# Altium PCB MZCAT_motherboard.PcbDoc (part 3 of 4)
Units mm, origin at the board's own origin, x right, y up, seen from the top; angles counter-clockwise.
Board outline 99.01 x 133.6 mm, 6 copper layers (Top Layer, Ref Top, Layer 2, Layer 3, Ref Bot, Bottom Layer), stack 1.473 mm thick; 289 components, 231 nets, 1176 pads, 492 vias.
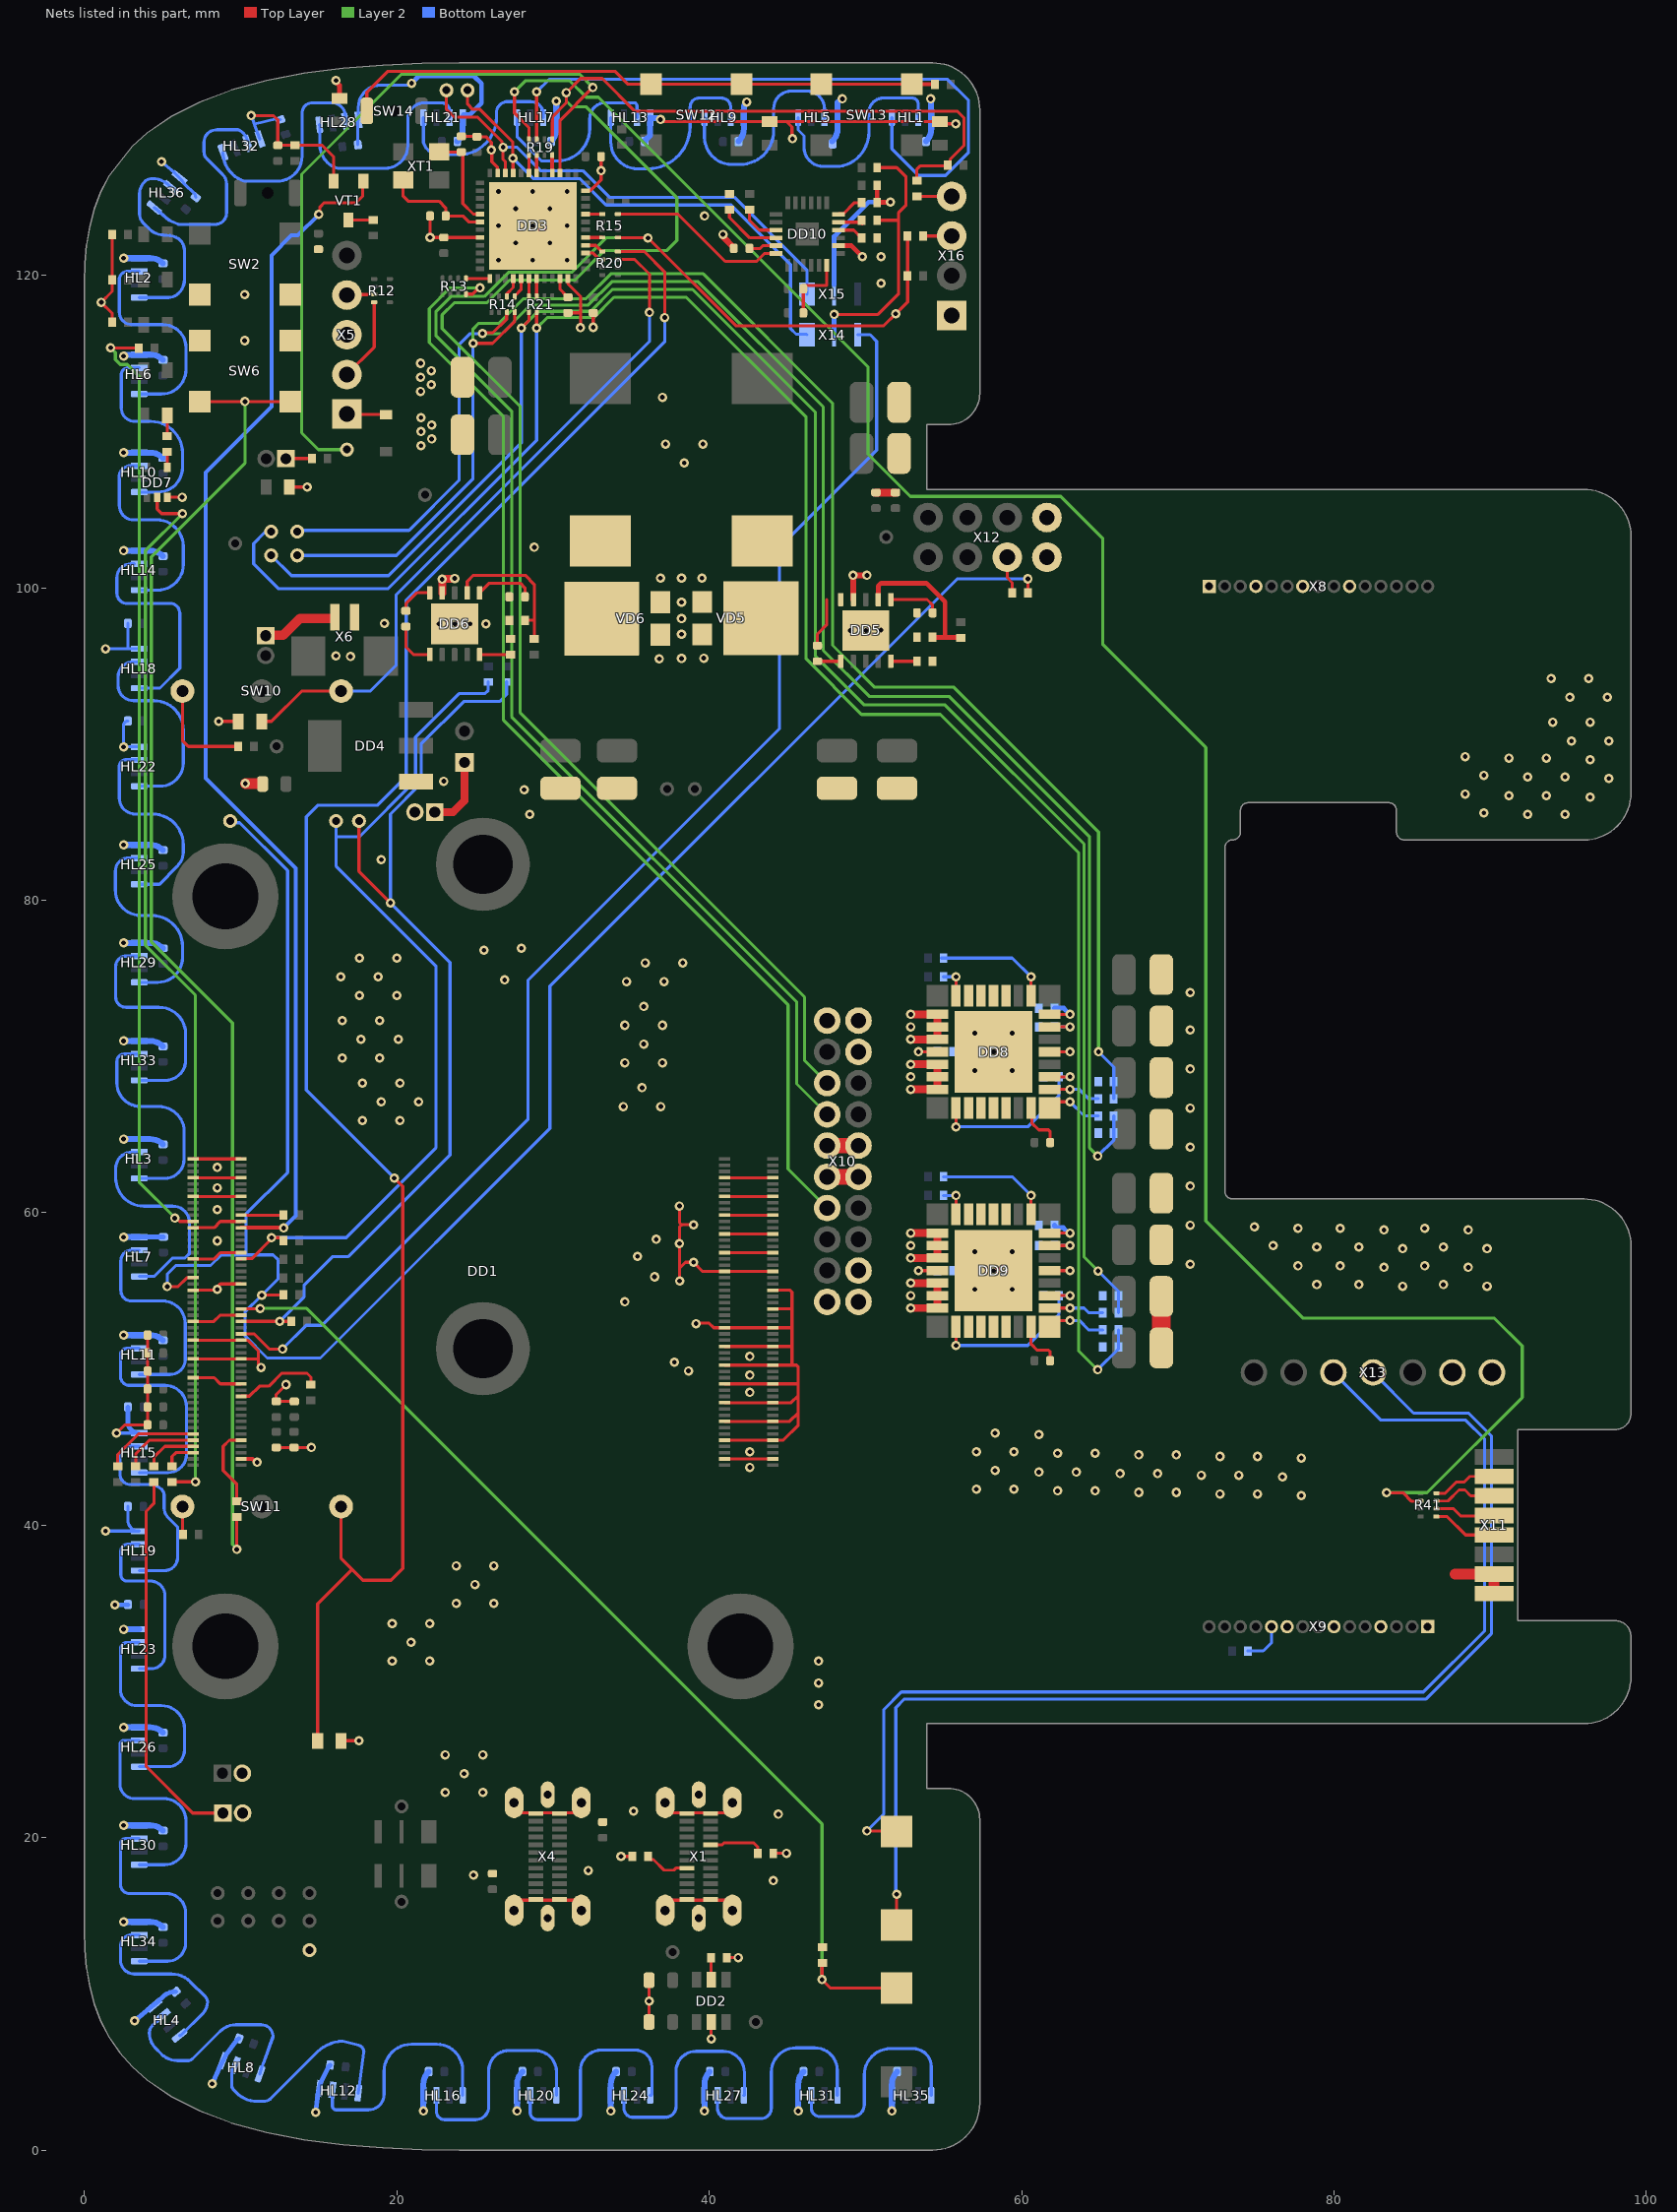
[diagram p7: the nets of this part, all layers, seen from the top]

## Via types
v1: diameter 0.6, hole 0.3, Top Layer to Bottom Layer, tented both sides, 477 vias
v2: diameter 0.6, hole 0.3, Top Layer to Bottom Layer, 15 vias

## Nets (pads, with @x,y where several pads share a name; then routed paths per layer and width w, separated by ;. In a path a pad name is that pad's centre, name@x,y a point inside that pad or via, vN(x,y) a via of type N, cw(c..) or ccw(c..) an arc to the next point about the centre after c; other vN are vias at no path point) (continued)
GND: DD1.1 DD1.2 DD1.7 DD1.8 DD1.13 DD1.14 DD1.22 DD1.23 DD1.32 DD1.33 DD1.42 DD1.43 DD1.52 DD1.53 DD1.59 DD1.60 DD1.65 DD1.66 DD1.71 DD1.74 DD1.98 DD1.107 DD1.108 DD1.113 DD1.114 DD1.119 DD1.120 DD1.125 DD1.126 DD1.131 DD1.132 DD1.137 DD1.138 DD1.144 DD1.150 DD1.155 DD1.156 DD1.161 DD1.162 DD1.167 DD1.168 DD1.173 DD1.174 DD1.179 DD1.180 DD1.185 DD1.186 DD1.191 DD1.192 DD1.197 DD1.198 DD2.2 DD3.8 DD3.23 DD3.35 DD3.47 DD3.49 DD4.1 DD5.0 DD5.9 DD6.0 DD6.9 DD7.3 DD8.5 DD8.18 DD8.19 DD8.20 DD8.22 DD8.23 DD8.24 DD8.33 DD9.5 DD9.18 DD9.19 DD9.20 DD9.22 DD9.23 DD9.24 DD9.33 DD10.18 DD10.20 HL1.4 HL2.4 HL3.4 HL4.4 HL5.4 HL6.4 HL7.4 HL8.4 HL9.4 HL10.4 HL11.4 HL12.4 HL13.4 HL14.4 HL15.4 HL16.4 HL17.4 HL18.4 HL19.4 HL20.4 HL21.4 HL22.4 HL23.4 HL24.4 HL25.4 HL26.4 HL27.4 HL28.4 HL29.4 HL30.4 HL31.4 HL32.4 HL33.4 HL34.4 HL35.4 HL36.4 R5.1 R9.1 R10.1 R11.1 R16.1 R22.2 R23.1 R24.1 R25.2 R26.2 R28.1 R30.1 R44.1 R45.1 R46.1 R47.1 R55.1 R57.1 R58.1 R59.1 R60.1 R61.1 R62.1 R63.1 R65.1 R66.1 SW2.1 SW5.2 SW6.2 SW7.2 SW8.2 TP16.1 VD5.1 VD5.2 VD6.1 VD6.2 VD9.2 VD10.2 VD11.2 VD12.2 VD13.2 VD14.2 VT1.2 X1.1 X1.12 X1.13 X1.24 X1.TP X4.1 X4.12 X4.13 X4.24 X4.TP X5.3 X6.2 X8.1 X8.4 X8.7 X8.10 X9.1 X9.4 X9.7 X9.10 X10.3 X10.17 X11.1 X11.2 X12.7 X12.8 X13.6 X13.7 X16.4 С1.1 С2.1 С3.1 С4.1 С5.1 С6.1 С7.1 С8.1 С9.1 С10.1 С11.1 С12.1 С13.1 С14.1 С15.1 С17.1 С18.1 С19.1 С22.1 С23.1 С24.1 С25.1 С26.1 С27.1 С28.1 С29.1 С30.1 С31.1 С32.1 С33.1 С34.1 С35.1 С36.1 С37.1 С38.1 С39.1 С40.1 С41.1 С42.1 С43.1 С46.1 С47.1 С48.1 С49.1 С50.1 С51.1 С52.1 С53.1 С54.1 С55.1 С56.1 С57.1 С58.1 С59.1 С60.1 С61.1 С62.1 С63.1 С64.1 С65.1 С66.1 С67.1 С68.1 С69.1 С70.1 С71.1 С72.1 С73.1 С74.1 С75.1 С76.1 С77.1 С78.1 С79.1 С80.1 С81.1 С82.1 С83.1 С84.1 С85.1 С86.1 С87.1 С88.1 | length 363.1
  Top Layer w0.2: R26.2@1.775,117 1.775,117.575 v1(1.075,118.275) 1.775,118.975 R25.2@1.775,119.725 R22.2@1.775,122.625 ; v1(2.05,45.9) 2.57,46.42 С37.1@4.038,46.42 С39.1@4.038,48.72 С30.1@4.038,49.87 С32.1@4.038,51.02 С34.1@4.038,52.17 ; DD7.3@5.3,105.8 v1(6.25,105.8) ; DD1.71@6.95,49.443 8.298,49.443 8.698,49.043 DD1.74@10.03,49.043 ; DD1.65@6.95,50.643 DD1.66@10.03,50.643 11.103,50.643 11.126,50.62 ; DD1.59@6.95,51.843 DD1.60@10.03,51.843 10.045,51.828 10.472,51.828 11.126,51.174 11.126,50.62 ; DD1.53@6.95,53.043 8.283,53.043 8.683,53.443 DD1.52@10.03,53.443 ; DD1.43@6.95,55.043 8.298,55.043 8.698,55.443 DD1.42@10.03,55.443 ; DD1.33@6.95,57.043 8.298,57.043 8.698,57.443 DD1.32@10.03,57.443 ; DD1.23@6.95,59.043 8.298,59.043 8.698,59.443 DD1.22@10.03,59.443 ; DD1.13@6.95,61.043 DD1.14@10.03,61.043 ; DD1.7@6.95,62.243 DD1.8@10.03,62.243 ; DD1.1@6.95,63.443 DD1.2@10.03,63.443 ; v1(8.6,91.45) VD14.2@9.85,91.45 ; v1(10.675,130.225) 12.1,130.225 12.375,129.95 С6.1@12.375,128.325 R16.1@13.475,128.325 15.225,128.325 15.95,127.6 VT1.2@15.95,126.02 ; v1(11.3,50.1) 11.126,50.274 11.126,50.62 ; С35.1@12.275,44.975 С36.1@13.42,44.975 v1(14.525,44.975) ; v1(12.9,49) 12.263,48.363 12.263,47.937 С33.1@12.275,47.925 С31.1@13.43,47.925 ; VD9.2@13.143,106.65 13.343,106.45 v1(14.25,106.45) ; VD13.2@16.425,26.2 v1(17.575,26.2) ; С8.1@22.125,123.8 v1(22.125,122.425) С11.1@23.005,122.425 25.2,122.425 DD3.8@25.325,122.425 ; С7.1@24.083,128.9 С7.1@24.125,128.9 25.225,128.9 25.251,128.874 25.7,128.874 26.05,128.524 v1(26.05,128.025) ; v1@26.075,128 26.075,127.275 26.45,126.9 DD3.47@26.45,126.55 ; X4.TP@27.505,15.7 27.805,16 30.36,16 X4.12@30.41,16.05 30.46,16 31.505,16 X4.TP@31.805,15.7 ; X4.TP@27.505,21.9 27.805,21.6 30.36,21.6 X4.1@30.41,21.55 30.46,21.6 31.505,21.6 X4.TP@31.805,21.9 ; С9.1@30.95,117.6 31.7,117.6 ; DD3.23@30.95,119.8 30.95,119.475 31.763,118.663 v1@31.763,116.663 ; DD3.35@32.075,125.425 32.389,125.425 33.075,126.111 v1(33.075,126.7) С13.1@33.075,127.6 ; v1(32.575,116.675) С12.1@32.575,117.6 ; v1(34.35,18.8) R9.1@35.075,18.8 ; С1.1@36.15,8.2 v1(36.15,9.537) С2.1@36.15,10.875 ; v1(36.875,129.975) 36.983,129.975 37.123,129.835 VD12.2@43.875,129.835 44.965,129.835 ; X1.TP@37.18,15.7 37.48,16 40.035,16 X1.12@40.085,16.05 40.135,16 41.18,16 X1.TP@41.48,15.7 ; X1.TP@37.18,21.9 37.48,21.6 40.035,21.6 X1.1@40.085,21.55 40.135,21.6 41.18,21.6 X1.TP@41.48,21.9 ; v1(38.098,60.43) 38.098,59.362 38.23,59.23 ; v1(38.1,55.63) 38.1,56.45 ; v1(39,59.23) 38.23,59.23 ; v1(39.15,52.9) 39.18,52.93 39.992,52.93 40.28,52.643 DD1.155@40.988,52.643 DD1.156@44.068,52.643 45.3,52.643 ; v1(40.125,7.125) DD2.2@40.125,8.2 ; DD1.197@40.988,44.243 DD1.198@44.068,44.243 ; DD1.191@40.988,45.443 DD1.192@44.068,45.443 44.743,45.443 45.7,46.4 45.7,47.2 ; DD1.185@40.988,46.643 DD1.186@44.068,46.643 45.143,46.643 45.7,47.2 ; DD1.179@40.988,47.843 DD1.180@44.068,47.843 45.243,47.843 45.7,48.3 ; DD1.173@40.988,49.043 DD1.174@44.068,49.043 45.643,49.043 45.7,49.1 ; DD1.167@40.988,50.243 DD1.168@44.068,50.243 45.3,50.243 ; DD1.161@40.988,51.443 DD1.162@44.068,51.443 45.3,51.443 ; DD1.131@40.988,57.443 DD1.132@44.068,57.443 ; DD1.125@40.988,58.643 DD1.126@44.068,58.643 ; DD1.119@40.988,59.843 DD1.120@44.068,59.843 ; DD1.113@40.988,61.043 DD1.114@44.068,61.043 ; DD1.107@40.988,62.243 DD1.108@44.068,62.243 ; R11.1@41.125,12.325 v1(41.85,12.325) ; DD1.150@44.068,53.843 45.3,53.843 ; DD1.144@44.068,55.043 45.183,55.043 45.3,54.925 45.3,53.843 ; DD1.138@44.068,56.243 DD1.137@40.988,56.243 39.582,56.243 v1(39,56.825) 38.475,56.825 38.1,56.45 ; R10.1@44.1,19 v1(44.943,19) ; v1(45.325,128.75) 45.3,128.775 45.3,129.5 44.965,129.835 ; С60.1@46.025,117.6 С59.1@46.025,119.145 46.025,119.345 47.525,119.345 DD10.18@47.525,120.65 ; v1(55.775,129.7) 54.91,129.7 VD11.2@54.775,129.835 44.965,129.835 ; DD9.5@61.8,56.298 DD9.5@61.8,56.298 63.099,56.299 v1(63.1,56.3) ; DD8.5@61.8,70.298 61.801,70.299 63.099,70.299 v1(63.1,70.3) ; 38.1,56.45 38.098,56.452 v1(38.098,58.03) 38.098,59.098 38.23,59.23 ; 45.3,50.243 45.3,51.443 ; 45.3,50.243 45.583,50.243 45.7,50.125 45.7,49.1 ; 45.3,51.443 45.3,52.643 ; 45.3,52.643 45.3,53.843 ; 45.7,47.2 45.7,48.3 ; 45.7,48.3 45.7,49.1
  Top Layer w0.25: DD1.98@10.03,44.243 10.751,44.243 10.969,44.025 v1(11.05,44.025)
  Top Layer w0.3: v1(16.1,132.475) 16.1,132.394 16.325,132.169 VD10.2@16.325,131.325 ; DD10.20@48.275,121.9 49.1,121.9 v1(49.8,121.2)
  Top Layer w0.4: v1(40.875,122.625) 40.913,122.587 40.913,122.437 41.575,121.775 С50.1@41.575,121.725 ; DD5.9@49.225,99.25 49.225,100.775 49.25,100.8 v1(50.1,100.8)
  Top Layer w0.5: DD6.9@22.9,99.675 v1(22.9,100.55) ; v1@22.919,100.569 v1@23.642,100.569 ; С28.1@50.67,106.1 50.72,106.1 С29.1@51.925,106.1 ; v1(52.9,53.9) v1(52.9,53.9) DD9.24@54.6,53.898 DD9.24@54.6,53.898 DD9.23@54.6,54.698 DD9.22@54.6,55.498 DD9.22@54.6,55.498 v1(52.9,55.5) v1(52.9,55.5) ; v1(52.9,57.1) v1(52.9,57.1) DD9.20@54.6,57.098 DD9.20@54.6,57.098 DD9.19@54.6,57.898 DD9.18@54.6,58.698 54.599,58.699 v1(52.9,58.7) ; v1(52.9,67.9) v1(52.9,67.9) 54.599,67.899 54.6,67.9 DD8.23@54.6,68.698 DD8.22@54.6,69.498 54.599,69.499 v1(52.9,69.5) ; v1(52.9,71.1) v1(52.9,71.1) 54.599,71.099 54.6,71.1 DD8.19@54.6,71.898 DD8.18@54.6,72.698 54.599,72.699 v1(52.9,72.7) v1(52.9,72.7) ; v1(52.9,58.7) v1(52.9,58.7) ; v1(52.9,69.5) v1(52.9,69.5)
  Top Layer w0.7: v1(10.3,87.475) С19.1@11.375,87.475 ; 87.75,36.875 X11.2@90.25,36.875 X11.1@90.25,35.625
  Top Layer w1.2: С48.1@68.95,51.35 С46.1@68.95,54.65
  Bottom Layer w0.2: v1(1.35,39.625) HL19.4@3.374,39.625 ; v1(1.35,96.1) 2.775,96.1 ; v1(2.05,45.9) 3.38,45.9 3.5,45.9 HL15.4@3.5,45.89 ; С57.1@2.775,41.2 2.775,40.339 ccw(c3.5,40.339) HL19.4@3.374,39.625 ; С74.1@2.775,91.475 ccw(c2.775,91.2) 2.5,91.2 v1(2.5,89.822) HL22.4@3.5,89.822 ; С70.1@2.775,97.725 2.775,96.1 ; HL19.4@3.5,39.614 3.5,39.625 HL19.4@3.374,39.625 ; HL18.4@3.5,96.098 3.5,96.1 2.775,96.1 ; v1(4.925,127.275) 5.762,126.573 6.068,126.249 6.223,126.084 6.362,125.903 7.071,125.208 С88.1@7.125,125 ; v1(10.675,130.225) 10.872,129.685 ; HL32.4@11.234,128.731 11.068,129.144 10.872,129.685 ; С84.1@12.533,129.965 12.326,130.022 10.872,129.685 ; С80.1@17.502,128.355 17.502,129.877 cw(c17.609,129.877) HL28.4@17.534,129.953 17.534,130.759 cw(c18.95,130.759) 18.95,132.175 20.825,132.175 ccw(c20.825,132.3) v1(20.95,132.3)
  Bottom Layer w0.3: v1(1.95,34.9) С53.1@2.775,34.9 ; С63.1@2.775,47.57 2.775,46.615 ccw(c3.5,46.615) HL15.4@3.38,45.9 ; v1(3.2,8.275) 3.269,8.332 4.13,9.05 4.439,9.297 4.729,9.529 4.994,9.794 cw(c5.832,8.955) С54.1@5.832,10.141 ; HL7.4@3.5,58.442 3.504,58.446 5.046,58.446 С71.1@5.05,58.45 ; v1(8.175,4.25) 8.21,4.328 8.684,5.377 HL8.4@8.866,5.731 9.048,6.085 9.737,7.037 С58.1@9.882,7.144 ; v1(14.8,2.425) 14.94,3.568 HL12.4@15.033,3.955 15.13,4.341 15.61,5.308 С64.1@15.727,5.445 ; v1(20.95,132.3) 21.425,132.775 24.925,132.775 25.425,132.275 25.425,131.025 24.689,130.289 24.265,130.289 24.215,130.239 HL21.4@24.215,130.1
  Bottom Layer w0.381: v1(2.5,14.61) HL34.4@3.5,14.61 4.204,14.61 cw(c4.204,13.449) С86.1@5.025,14.27 ; v1(2.5,20.786) HL30.4@3.5,20.786 4.204,20.786 cw(c4.204,19.625) С82.1@5.025,20.446 ; v1(2.5,27.062) HL26.4@3.5,27.062 4.204,27.062 cw(c4.204,25.901) С78.1@5.025,26.722 ; v1(2.5,33.338) HL23.4@3.5,33.338 ; v1(2.5,52.166) HL11.4@3.5,52.166 4.204,52.166 cw(c4.204,51.005) С67.1@5.025,51.826 ; v1(2.5,58.442) HL7.4@3.5,58.442 ; v1(2.5,64.718) HL3.4@3.5,64.718 4.204,64.718 cw(c4.204,63.557) С75.1@5.025,64.378 ; v1(2.5,70.994) HL33.4@3.5,70.994 4.204,70.994 cw(c4.204,69.833) С85.1@5.025,70.654 ; v1(2.5,77.27) HL29.4@3.5,77.27 4.204,77.27 cw(c4.204,76.109) С81.1@5.025,76.93 ; v1(2.5,83.546) HL25.4@3.5,83.546 4.204,83.546 cw(c4.204,82.385) С77.1@5.025,83.206 ; v1(2.5,102.374) HL14.4@3.5,102.374 4.204,102.374 cw(c4.204,101.213) С66.1@5.025,102.034 ; v1(2.5,108.65) HL10.4@3.5,108.65 4.204,108.65 cw(c4.204,107.489) С62.1@5.025,108.31 ; v1(2.5,114.825) 2.559,114.825 2.651,114.916 3.49,114.916 HL6.4@3.5,114.926 4.204,114.926 cw(c4.204,113.765) С56.1@5.025,114.586 ; v1(2.5,121.102) HL2.4@3.5,121.102 4.204,121.102 cw(c4.204,119.941) С52.1@5.025,120.762 ; v1(21.695,2.5) HL16.4@21.695,3.5 21.695,4.204 cw(c22.856,4.204) С68.1@22.035,5.025 ; С73.1@23.875,128.575 ccw(c23.054,129.396) 24.215,129.396 HL21.4@24.215,130.1 ; v1(27.695,2.5) HL20.4@27.695,3.5 27.695,4.204 cw(c28.856,4.204) С72.1@28.035,5.025 ; С69.1@29.875,128.575 ccw(c29.054,129.396) 30.215,129.396 HL17.4@30.215,130.1 30.208,130.108 30.208,131.142 v1(30.2,131.15) ; v1(33.695,2.5) HL24.4@33.695,3.5 33.695,4.204 cw(c34.856,4.204) С76.1@34.035,5.025 ; С65.1@35.875,128.575 35.935,128.635 35.935,128.685 36.215,128.965 HL13.4@36.215,130.061 ; HL13.4@36.215,130.1 HL13.4@36.215,130.061 ; v1(36.875,129.975) 36.816,129.975 36.739,130.052 36.224,130.052 HL13.4@36.215,130.061 ; v1(39.695,2.5) HL27.4@39.695,3.5 39.695,4.204 cw(c40.856,4.204) С79.1@40.035,5.025 ; С61.1@41.875,128.575 ccw(c41.054,129.396) 42.215,129.396 HL9.4@42.215,130.1 42.225,130.11 42.225,130.865 42.4,131.041 v1(42.4,131.1) ; v1(45.695,2.5) HL31.4@45.695,3.5 45.695,4.204 cw(c46.856,4.204) С83.1@46.035,5.025 ; С55.1@47.875,128.575 ccw(c47.054,129.396) 48.215,129.396 HL5.4@48.215,130.1 48.216,131.076 48.525,131.385 v1@48.525,131.4 ; v1(51.695,2.5) HL35.4@51.695,3.5 51.695,4.204 cw(c52.856,4.204) С87.1@52.035,5.025 ; С51.1@53.875,128.575 ccw(c53.054,129.396) 54.215,129.396 HL1.4@54.215,130.1 54.206,130.11 54.206,131.294 v1@54.175,131.325
  other v1: 44.1,17.25 24.9,17.6 32.25,17.9 44.425,21.5 35.15,21.7 23.1,22.902 25.5,22.902 24.3,24.102 23.1,25.302 25.5,25.302 47,28.5 47,29.9 19.7,31.302 22.1,31.302 47,31.3 20.9,32.502 19.7,33.702 22.1,33.702 23.8,35.002 26.2,35.002 25,36.202 23.8,37.402 26.2,37.402 77.9,41.9 72.7,42 75.1,42 67.5,42.1 69.9,42.1 62.3,42.2 64.7,42.2 57.1,42.3 59.5,42.3 76.7,43.1 71.5,43.2 73.9,43.2 66.3,43.3 68.7,43.3 61.1,43.4 63.5,43.4 58.3,43.5 42.6,43.7 77.9,44.3 72.7,44.4 75.1,44.4 67.5,44.5 69.9,44.5 62.3,44.6 64.7,44.6 42.6,44.7 57.1,44.7 59.5,44.7 61.1,45.8 58.3,45.9 42.6,48.5 42.6,49.6 38.672,49.88 37.766,50.434 42.6,50.8 34.6,54.3 52.9,54.7 8.5,55.1 57,55.1 59.4,55.1 84.4,55.3 89.8,55.3 78.9,55.4 81.6,55.4 87,55.4 36.5,55.9 58.2,56.3 83.2,56.5 88.6,56.5 77.7,56.6 80.4,56.6 85.8,56.6 70.8,56.7 35.4,57.2 57,57.5 59.4,57.5 84.4,57.7 89.8,57.7 78.9,57.8 81.6,57.8 87,57.8 52.9,57.9 76.1,57.9 8.5,58.2 36.6,58.3 83.2,58.9 88.6,58.9 77.7,59 80.4,59 85.8,59 74.9,59.1 70.8,59.2 8.5,60.2 8.5,61.6 70.8,61.7 8.5,62.9 70.8,64.2 17.8,65.902 20.2,65.902 70.8,66.7 34.5,66.8 36.9,66.8 19,67.102 21.4,67.102 35.7,68 17.8,68.302 20.2,68.302 52.9,68.7 57,69.1 59.4,69.1 70.8,69.2 34.6,69.6 37,69.6 16.5,69.902 18.9,69.902 58.2,70.3 35.8,70.8 17.7,71.102 20.1,71.102 57,71.5 59.4,71.5 70.8,71.7 52.9,71.9 34.6,72 37,72 16.5,72.302 18.9,72.302 35.8,73.2 17.6,73.902 20,73.902 70.8,74.1 34.7,74.8 37.1,74.8 26.9,74.9 16.4,75.102 18.8,75.102 35.9,76 38.3,76 17.6,76.302 20,76.302 25.575,76.8 27.975,76.925 19,82.6 28.5,85.5 92.4,85.5 94.8,85.5 89.6,85.6 96.4,86.6 91.2,86.7 93.6,86.7 88.4,86.8 28.15,87.075 23,87.625 97.6,87.8 92.4,87.9 94.8,87.9 89.6,88 96.4,89 91.2,89.1 93.6,89.1 88.4,89.2 95.2,90.2 97.6,90.2 94,91.4 96.4,91.4 95.1,93 97.5,93 93.9,94.2 96.3,94.2 36.8,95.45 38.225,95.475 39.65,95.5 17.025,95.6 16.1,95.65 38.225,97.025 49.025,97.275 50.025,97.275 51,97.3 22.7,97.7 23.7,97.7 24.7,97.7 25.7,97.7 19.2,97.725 38.225,98.025 38.225,99.075 23.7,100.6 36.875,100.625 38.225,100.625 39.525,100.625 49.2,100.8 28.8,102.599 38.4,108.002 21.55,109.1 37.2,109.202 39.6,109.202 22.225,109.525 21.55,110 22.225,110.425 21.55,110.9 37,112.2 21.525,112.575 22.2,113 21.525,113.475 22.2,113.9 21.525,114.375 10.25,115.825 31.75,116.65 10.25,118.775 51,119.5 51,121.2 39.7,123.8 48.525,131.3 54.175,131.3
  other v2: 26.5,120.975 28.7,120.975 30.9,120.975 27.6,122.075 29.8,122.075 26.5,123.175 28.7,123.175 30.9,123.175 27.6,124.275 29.8,124.275 26.5,125.375 28.7,125.375 30.9,125.375
"GYRO INT": DD10.12 R15.7 | length 11.6
  Top Layer w0.2: R15.7@34.152,123.925 38,123.925 41.025,120.9 43.026,120.9 43.526,121.4 DD10.12@44.275,121.4
I2C1_SCL: DD3.45 TP29.1 X14.1 | length 32.6
  Top Layer w0.2: TP29.1@24.525,131.85 24.524,131.849 24.524,130.951 24.85,130.625 25.325,130.625 27.425,128.525 v1(27.425,127.5) ; DD3.45@27.45,126.55 27.438,126.563 27.438,127.437 v1@27.45,127.45
  Bottom Layer w0.2: v1(27.425,127.5) 28.725,126.2 31.7,126.2 33.4,124.5 41.4,124.5 45.2,120.7 45.2,116.6 45.567,116.233 46.217,116.233 X14.1@46.25,116.2
I2C1_SDA: DD3.46 TP28.1 X15.1 | length 32
  Top Layer w0.2: TP28.1@23.175,131.85 23.175,130.625 23.675,130.125 25.175,130.125 26.726,128.574 26.726,128.274 v1(26.8,128.2) 26.787,128.187 26.787,127.423 26.95,127.261 DD3.46@26.95,126.55
  Bottom Layer w0.2: v1(26.8,128.2) 27.7,128.2 29.2,126.7 31.9,126.7 33.6,125 41.6,125 46.25,120.35 X15.1@46.25,118.8
I2C3_SCL: R15.1 R72.1 R73.1 X10.8 | length 103
  Top Layer w0.2: R15.1@34.152,122.425 34.164,122.413 36.062,122.413 41.7,116.775 51.175,116.775 v1(51.938,117.538) 52.7,118.3 R73.1@52.7,119.98 R72.1@52.7,122.52
  Layer 2 w0.2: v1(36.075,122.4) 33.4,122.4 31.2,120.2 27.15,120.2 25.6,118.65 23.475,118.65 22.5,117.675 22.5,116.15 27.35,111.3 27.35,91.75 45.6,73.5 45.6,68.251 X10.8@47.553,66.298
I2C3_SCL_4: DD3.29 R15.2 | length 1.1
  Top Layer w0.2: DD3.29@32.075,122.425 R15.2@33.15,122.425
I2C3_SDA: R19.1 R71.1 R74.1 X10.6 | length 125.8
  Top Layer w0.2: R19.1@29.95,128.702 29.95,130.15 30.85,131.05 v1(30.85,131.7) 31.75,132.6 33.15,132.6 35.25,130.5 55.9,130.5 56.3,130.1 56.3,128.3 55.425,127.425 55.425,127.2 R74.1@55.275,127.05 ; R71.1@53.3,126.06 53.293,126.067 53.293,126.793 53.5,127 R74.1@55.275,127
  Layer 2 w0.2: v1(30.85,131.7) 30.85,131.15 31.2,130.8 32.1,130.8 37.925,124.975 37.925,122.225 37.3,121.6 33.3,121.6 31.4,119.7 27.225,119.7 25.775,118.25 23.683,118.25 22.9,117.467 22.9,116.6 27.9,111.6 27.9,92 46.1,73.8 46.1,69.751 X10.6@47.553,68.298
I2C3_SDA_4: DD3.40 R19.2 | length 1.2
  Top Layer w0.25: DD3.40@29.95,126.55 R19.2@29.95,127.7
IMU_INT_4: DD3.32 R15.8 | length 1.1
  Top Layer w0.2: DD3.32@32.075,123.925 R15.8@33.15,123.925
LED1_DATA: HL1.1 R19.5 | length 43.1
  Top Layer w0.2: R19.5@28.95,128.702 v1(28.95,131.75)
  Bottom Layer w0.2: v1(28.95,131.75) 29.75,132.55 55.25,132.55 56.6,131.2 56.6,127.875 55.125,126.4 53.4,126.4 51.695,128.105 HL1.1@51.695,130.1
LED1_DATA_4: DD3.42 R19.6 | length 1.2
  Top Layer w0.2: DD3.42@28.95,126.55 R19.6@28.95,127.7
LED2_DATA: R19.7 R41.6 | length 143.7
  Top Layer w0.2: v1(27.525,131.75) 27.525,130.394 28.45,129.469 R19.7@28.45,128.702 ; v1(83.367,42.083) 83.374,42.076 84.424,42.076 84.975,41.525 85.525,41.525 R41.6@85.55,41.55
  Layer 2 w0.2: v1(27.525,131.75) 28.225,132.45 31.075,132.45 32.125,131.4 32.9,131.4 50.175,114.125 50.175,108.55 52.875,105.85 62.5,105.85 65.2,103.15 65.2,96.375 71.8,89.775 71.8,59.475 78.025,53.25 90.275,53.25 92.05,51.475 92.05,48.175 85.958,42.083 v1(83.367,42.083)
LED2_DATA_4: DD3.43 R19.8 | length 1.2
  Top Layer w0.2: DD3.43@28.45,126.55 R19.8@28.45,127.7
LiDAR_TX: DD1.39 R42.1 R43.1 TP23.1 | length 125.9
  Top Layer w0.2: v1(5.3,55.275) 5.995,55.275 6.548,55.828 6.936,55.828 DD1.39@6.95,55.843 ; v1(11.35,54.725) 12.725,54.725 R43.1@12.75,54.75 ; R42.1@60.4,99.675 v1(60.4,100.575)
  Bottom Layer w0.2: v1(5.3,55.275) 5.3,56.075 5.85,56.625 8.075,56.625 8.747,57.297 10.335,57.297 ; TP23.1@9.325,85.075 9.43,84.97 9.93,84.97 13,81.9 13,62.575 10.335,59.91 10.335,57.297 ; v1(60.4,100.575) 55.875,100.575 29.8,74.5 29.8,65.4 15.1,50.7 11.7,50.7 10.275,52.125 10.275,53.65 v1(11.35,54.725) 12.4,55.775 12.4,56.975 12.078,57.297 10.335,57.297
LiDAR_TX_6: R42.2 X12.6 | length 2.4
  Top Layer w0.2: X12.6@59.08,101.96 59.08,100.645 59.4,100.325 R42.2@59.4,99.675
LIMIT_SW1: R20.5 SW10.1 VD14.1 | length 44.2
  Top Layer w0.2: VD14.1@11.35,91.45 11.975,91.45 13.92,93.395 SW10.1@16.43,93.395 ; R20.5@34.202,121.025 35.225,121.025 36.175,120.075 v1(36.175,117.625)
  Bottom Layer w0.2: SW10.1@16.43,93.395 18.295,93.395 19.95,95.05 19.95,99.55 36.175,115.775 v1(36.175,117.625)
LIMIT_SW1_4: DD3.27 R20.6 | length 1.2
  Top Layer w0.2: DD3.27@32.075,121.425 32.573,121.425 32.973,121.025 R20.6@33.15,121.025
LIMIT_SW2: R20.7 SW11.1 VD13.1 | length 120.8
  Top Layer w0.2: VD13.1@14.925,26.2 14.925,34.97 17.128,37.173 ; SW11.1@16.43,41.195 16.43,37.87 17.128,37.173 ; v1(19.833,62.22) 20.375,61.677 20.375,37.225 19.625,36.475 17.825,36.475 17.128,37.173 ; R20.7@34.202,121.525 35.85,121.525 37.15,120.225 v1(37.15,117.3)
  Bottom Layer w0.2: v1(19.833,62.22) 14.2,67.852 14.2,85.35 14.925,86.075 18.75,86.075 20.6,87.925 20.6,99.2 37.15,115.75 v1(37.15,117.3)
LIMIT_SW2_4: DD3.28 R20.8 | length 1.2
  Top Layer w0.2: DD3.28@32.075,121.925 32.725,121.925 R20.8@33.1,121.55
MOTOR1_EN_7: DD8.10 R50.2 | length 7.4
  Top Layer w0.2: DD8.10@60.6,73.898 v1(60.6,75.1)
  Bottom Layer w0.2: R50.2@54.868,76.3 59.4,76.3 v1(60.6,75.1)
MOTOR1_IN_A: R14.5 R48.1 R62.2 TP26.1 | length 111.9
  Top Layer w0.2: v1(25.475,116.275) 25.532,116.332 26.158,116.332 27.025,117.199 27.025,117.625 R14.5@27.05,117.65
  Layer 2 w0.2: v1(25.475,116.275) 26.725,116.275 28.55,118.1 32.26,118.1 33.76,119.6 39.275,119.6 47.3,111.575 47.3,96 50.25,93.05 55.35,93.05 64.35,84.05 64.35,64.15 v1@64.707,63.793
  Bottom Layer w0.2: TP26.1@13.822,103.675 20.775,103.675 23.975,106.875 23.975,115.563 24.687,116.275 v1(25.475,116.275) ; v1(64.875,63.625) 65.9,64.65 R62.2@65.9,65.1 R48.1@65.9,66.2
MOTOR1_IN_B: R14.7 R49.1 R60.2 TP24.1 | length 109.6
  Top Layer w0.2: v1(24.875,115.65) 26.125,115.65 27.55,117.075 R14.7@27.55,117.65
  Layer 2 w0.2: v1(24.875,115.65) 24.875,116.575 25.225,116.925 26.525,116.925 28.1,118.5 32.1,118.5 33.7,120.1 39.618,120.1 47.9,111.818 47.9,96.325 50.589,93.636 55.664,93.636 64.924,84.376 v1(64.924,70.3)
  Bottom Layer w0.2: TP24.1@13.625,102.075 19.975,102.075 24.875,106.975 v1(24.875,115.65) ; v1(64.924,70.3) 65.9,69.324 R60.2@65.9,68.4 R49.1@65.9,67.3
MOTOR1_INV_7: DD8.7 R58.2 | length 2.3
  Top Layer w0.2: DD8.7@61.8,71.898 61.801,71.899 63.099,71.899 v1(63.1,71.9)
  Bottom Layer w0.2: R58.2@62.1,71.9 v1(63.1,71.9)
MOTOR1A_OUT: DD8.12 DD8.13 DD8.14 DD8.15 X10.1 X10.2
MOTOR1B_OUT: DD8.27 DD8.28 DD8.29 DD8.30 X10.9 X10.10 | length 2
  Top Layer w1: X10.10@47.553,64.298 X10.9@49.553,64.298
MOTOR2_EN_7: DD9.10 R53.2 | length 7.3
  Top Layer w0.2: DD9.10@60.6,59.898 v1(60.6,61.1)
  Bottom Layer w0.2: R53.2@55,62.3 59.4,62.3 v1(60.6,61.1)
MOTOR2_IN_A: R21.3 R51.1 R63.2 TP27.1 | length 129.2
  Top Layer w0.2: v1(28.95,116.625) R21.3@28.95,117.648
  Layer 2 w0.2: v1(28.95,116.625) 29.625,117.3 32.6,117.3 33.9,118.6 38.525,118.6 46.2,110.925 46.2,95.45 49.75,91.9 54.8,91.9 63.65,83.05 63.65,51.15 64.85,49.95 v1(64.875,49.95)
  Bottom Layer w0.2: TP27.1@11.508,103.523 10.825,102.84 10.825,101.525 12.4,99.95 19.45,99.95 28.95,109.45 v1(28.95,116.625) ; v1(64.875,49.95) 66.2,51.275 R51.1@66.2,52.5
MOTOR2_IN_B: R21.1 R52.1 R61.2 TP25.1 | length 120.5
  Top Layer w0.2: v1(27.975,116.625) 28.45,117.1 R21.1@28.45,117.648
  Layer 2 w0.2: v1(27.975,116.625) 29.05,117.7 32.4,117.7 33.8,119.1 38.925,119.1 46.8,111.225 46.8,95.625 49.925,92.5 55.1,92.5 64,83.6 64,57.175 v1(64.9,56.275)
  Bottom Layer w0.2: TP25.1@11.95,102.075 13.25,100.775 19.475,100.775 27.975,109.275 v1(27.975,116.625) ; v1(64.9,56.275) 66.2,54.975 R61.2@66.2,54.7 R52.1@66.2,53.6
MOTOR2_INV_7: DD9.7 R59.2 | length 2.3
  Top Layer w0.2: DD9.7@61.8,57.898 61.801,57.899 63.099,57.899 v1(63.1,57.9)
  Bottom Layer w0.2: R59.2@62.1,57.9 v1(63.1,57.9)
MOTOR2A_OUT: DD9.12 DD9.13 DD9.14 DD9.15 X10.11 X10.12 | length 2
  Top Layer w1: X10.12@47.553,62.298 X10.11@49.553,62.298
MOTOR2B_OUT: DD9.27 DD9.28 DD9.29 DD9.30 X10.19 X10.20
NetDD1_20: DD1.20 R37.1 | length 2.6
  Top Layer w0.2: DD1.20@10.03,59.843 R37.1@12.6,59.843
NetDD1_21: DD1.21 R31.1 | length 60.8
  Top Layer w0.2: v1(1.675,115.375) 1.7,115.35 R31.1@3.475,115.35 ; v1(5.775,59.65) 5.883,59.65 6.091,59.443 6.943,59.443 DD1.21@6.947,59.446
  Layer 2 w0.2: v1(1.675,115.375) 1.675,115.358 1.975,115.058 1.975,114.608 2.283,114.3 2.75,114.3 3.5,113.55 3.5,61.967 5.775,59.692 v1(5.775,59.65)
NetDD1_24: DD1.24 VT1.1 | length 78
  Top Layer w0.2: v1(15,123.9) 15.077,123.977 15.077,124.377 15.35,124.65 17.4,124.65 17.812,125.062 17.812,125.982 VT1.1@17.85,126.02
  Top Layer w0.25: DD1.24@10.03,59.043 v1@12.732,59.043
  Bottom Layer w0.25: v1(12.75,59.025) 13.525,59.8 13.525,82.05 7.75,87.825 7.75,107.375 11.975,111.6 11.975,121.275 13.254,122.554 13.654,122.554 v1(15,123.9)
NetDD1_34: DD1.34 R2.2 R4.1 TP2.1 | length 55.7
  Top Layer w0.2: DD1.34@10.03,57.043 10.045,57.057 10.707,57.057 11.975,58.325 v1(11.975,58.4) 12.6,58.4 12.75,58.25 R4.1@12.75,58.225
  Bottom Layer w0.2: v1(11.975,58.4) 16.755,58.4 22.5,64.145 22.5,75.8 16.1,82.2 16.1,84.069 ; TP2.1@16.1,85.075 16.1,84.069 ; R2.2@25.85,93.975 25.85,93.45 25.625,93.225 23.975,93.225 21.2,90.45 21.2,87.675 17.594,84.069 16.1,84.069
NetDD1_50: DD1.50 R5.2 SW1.2 | length 66.9
  Top Layer w0.2: DD1.50@10.03,53.843 10.045,53.857 11.232,53.857 v1(11.25,53.875) ; R5.2@47.25,11.986 47.225,11.961 v1(47.225,10.911) 47.761,10.375 SW1.2@52,10.375
  Layer 2 w0.2: v1(11.25,53.875) 14.225,53.875 47.225,20.875 v1(47.225,10.911)
NetDD1_54: DD1.54 R1.2 R3.1 TP1.1 | length 61.3
  Top Layer w0.2: DD1.54@10.03,53.043 10.034,53.046 12.496,53.046 v1(12.5,53.05) R3.1@13.25,53.05 ; TP1.1@17.6,85.027 17.575,85.002 17.575,81.854 v1(19.588,79.84)
  Bottom Layer w0.2: v1(12.5,53.05) 14.051,54.601 14.051,55.351 15.9,57.2 16.9,57.2 23.4,63.7 23.4,76.029 v1(19.588,79.84) 19.588,85.513 21.55,87.475 21.55,90 24.275,92.725 26.575,92.725 27.025,93.175 R1.2@27.025,93.975
NetDD1_78: DD1.78 R38.1 | length 5.7
  Top Layer w0.2: DD1.78@10.03,48.243 10.045,48.257 10.557,48.257 11.2,48.9 11.8,48.9 12.625,49.725 14.25,49.725 14.5,49.475 R38.1@14.5,49
NetDD1_89: DD1.89 R33.1 | length 6.1
  Top Layer w0.2: R33.1@2.125,43.775 2.125,44.525 3.443,45.843 DD1.89@6.95,45.843
NetDD1_91: DD1.91 R34.1 | length 4.8
  Top Layer w0.2: R34.1@3.283,43.775 3.283,44.583 4.143,45.443 DD1.91@6.95,45.443
NetDD1_92: DD1.92 R35.1 | length 5.2
  Top Layer w0.2: R35.1@9.75,41.525 9.75,42.625 8.875,43.5 8.875,45.05 9.268,45.443 DD1.92@10.03,45.443
NetDD1_93: DD1.93 R36.1 | length 3.4
  Top Layer w0.2: R36.1@4.442,43.775 4.442,44.342 5.143,45.043 DD1.93@6.95,45.043
NetDD1_95: DD1.95 R32.1 | length 2.1
  Top Layer w0.2: R32.1@5.6,43.775 5.6,44.4 5.843,44.643 DD1.95@6.95,44.643
NetDD2_5: DD2.5 R11.2 | length 1.4
  Top Layer w0.2: DD2.5@40.125,10.9 R11.2@40.125,12.325
NetDD3_5: DD3.5 XT1.3 С7.2 | length 6.2
  Top Layer w0.2: XT1.3@22.7,127.9 24.225,127.9 24.225,124.6 24.9,123.925 DD3.5@25.325,123.925
NetDD3_6: DD3.6 XT1.1 С8.2 | length 6.7
  Top Layer w0.2: XT1.1@20.4,125.9 20.4,125.075 20.725,124.75 22.7,124.75 23.125,124.325 С8.2@23.125,123.8 24.225,123.8 24.6,123.425 DD3.6@25.325,123.425
NetDD3_22: DD3.22 С9.2 | length 1.4
  Top Layer w0.2: DD3.22@30.45,119.8 30.45,119.1 30.8,118.75 30.8,118.7 30.9,118.6 С9.2@30.95,118.6
NetDD3_39: DD3.39 TP15.1 | length 47.9
  Top Layer w0.2: DD3.39@30.45,126.55 30.45,129.925 v1(32.55,132.025)
  Layer 2 w0.2: TP15.1@16.8,108.85 14.975,108.85 13.9,109.925 13.9,126.475 20.3,132.875 31.7,132.875 v1(32.55,132.025)
NetDD5_1: DD5.1 С20.2 | length 1.5
  Top Layer w0.2: С20.2@46.925,95.3 DD5.1@48.425,95.3
NetDD5_5: DD5.5 R23.2 | length 1.7
  Top Layer w0.2: DD5.5@51.625,95.3 R23.2@53.3,95.3
NetDD5_6: DD5.6 С22.2 | length 3.3
  Top Layer w0.2: DD5.6@51.625,99.25 53.95,99.25 54.3,98.9 С22.2@54.3,98.4
NetDD5_7: DD5.7 R27.1 R28.2 | length 10.8
  Top Layer w0.3: DD5.7@50.825,99.25 50.825,100.124 51.001,100.3 53.9,100.3 55.1,99.1 55.1,96.822 ; R28.2@54.3,96.847 54.325,96.822 55.1,96.822 ; R27.1@56.1,96.797 R27.1@56.075,96.822 ; 55.1,96.822 R27.1@56.075,96.822 ; 55.1,96.822 55.95,96.822 R27.1@56.075,96.822
NetDD5_10: DD5.10 L1.2 VD5.3 С20.1 | length 3.2
  Top Layer w0.2: С20.1@46.925,96.3 46.925,97.05 47.525,97.65 47.525,99.262
NetDD6_1: DD6.1 С21.2 | length 3
  Top Layer w0.2: С21.2@20.575,97.525 20.575,96.225 21.075,95.725 DD6.1@22.1,95.725
NetDD6_5: DD6.5 R24.2 | length 2
  Top Layer w0.2: DD6.5@25.3,95.725 R24.2@27.265,95.725
NetDD6_6: DD6.6 С23.2 | length 3.9
  Top Layer w0.2: DD6.6@25.3,99.675 25.925,100.3 27.9,100.3 28.2,100 С23.2@28.2,99.425
NetDD6_7: DD6.7 R29.1 R30.2 | length 9.6
  Top Layer w0.2: DD6.7@24.5,99.675 24.5,100.4 24.9,100.8 28.225,100.8 28.8,100.225 28.8,97.925 ; R30.2@28.2,97.925 28.8,97.925 ; R29.1@28.8,96.7 28.8,97.925
NetDD6_10: DD6.10 L2.2 VD6.3 С21.1 | length 2.3
  Top Layer w0.2: С21.1@20.575,98.525 20.575,98.975 21.3,99.7 22.075,99.7 DD6.10@22.1,99.675
NetDD7_2: DD7.2 R32.2 | length 68.3
  Top Layer w0.2: DD7.2@4.65,105.8 4.65,105.042 4.942,104.75 v1(6.275,104.75) ; R32.2@5.6,42.775 v1(7.1,42.775)
  Layer 2 w0.2: v1(6.275,104.75) 3.9,102.375 3.9,77.125 7.1,73.925 v1(7.1,42.775)
NetDD7_4: DD7.4 R39.1 | length 1
  Top Layer w0.2: DD7.4@5.3,107.7 R39.1@5.3,108.7
NetDD8_1: DD8.1 R48.2 | length 3.6
  Top Layer w0.2: DD8.1@61.8,66.698 62.202,67.1 v1(63.1,67.1)
  Bottom Layer w0.2: v1(63.1,67.1) 64,66.2 R48.2@64.9,66.2
NetDD8_2: DD8.2 R49.2 | length 3.3
  Top Layer w0.2: DD8.2@61.8,67.898 61.801,67.899 63.099,67.899 v1(63.1,67.9)
  Bottom Layer w0.2: v1(63.1,67.9) 63.7,67.9 64.3,67.3 R49.2@64.9,67.3
NetDD8_3: DD8.3 DD8.26 R55.2 | length 11.8
  Top Layer w0.2: v1(55.8,65.5) DD8.26@55.8,66.698 ; DD8.3@61.8,68.698 61.801,68.699 63.099,68.699 v1(63.1,68.7)
  Bottom Layer w0.2: v1(55.8,65.5) 60.4,65.5 62.4,67.5 R55.2@62.4,68.7 v1(63.1,68.7)
NetDD8_8: DD8.8 R46.2 | length 2.5
  Top Layer w0.2: DD8.8@61.8,72.698 61.801,72.699 63.099,72.699 v1(63.1,72.7)
  Bottom Layer w0.3: R46.2@62.1,73.1 62.7,73.1 v1(63.1,72.7)
NetDD8_16: DD8.16 R54.2 | length 2
  Top Layer w0.2: DD8.16@55.8,73.898 v1(55.8,75.1)
  Bottom Layer w0.2: R54.2@55,75.1 v1(55.8,75.1)
NetDD8_21: DD8.21 R44.2 | length 2.4
  Top Layer w0.2: v1(53.4,70.3) v1(53.4,70.3) 54.599,70.299 DD8.21@54.6,70.298
  Bottom Layer w0.2: v1(53.4,70.3) R44.2@54.6,70.3
NetDD8_32: DD8.32 С44.2 | length 3
  Top Layer w0.2: DD8.32@60.6,66.698 60.65,66.648 60.65,65.75 61.1,65.3 61.71,65.3 61.827,65.183 С44.2@61.827,64.6
NetDD9_1: DD9.1 R51.2 | length 3.8
  Top Layer w0.2: DD9.1@61.8,52.698 62.202,53.1 v1(63.1,53.1)
  Bottom Layer w0.2: v1(63.1,53.1) 63.7,53.1 64.3,52.5 R51.2@65.2,52.5
NetDD9_2: DD9.2 R52.2 | length 3.5
  Top Layer w0.2: DD9.2@61.8,53.898 DD9.2@61.8,53.898 63.099,53.899 v1(63.1,53.9)
  Bottom Layer w0.2: v1(63.1,53.9) 64,53.9 64.3,53.6 R52.2@65.2,53.6
NetDD9_3: DD9.3 DD9.26 R57.2 | length 11.8
  Top Layer w0.2: v1(55.8,51.5) DD9.26@55.8,52.698 ; DD9.3@61.8,54.698 DD9.3@61.8,54.698 63.099,54.699 v1(63.1,54.7)
  Bottom Layer w0.2: v1(55.8,51.5) 60.4,51.5 62.4,53.5 R57.2@62.4,54.7 v1(63.1,54.7)
NetDD9_8: DD9.8 R47.2 | length 2.5
  Top Layer w0.2: DD9.8@61.8,58.698 61.801,58.699 63.099,58.699 v1(63.1,58.7)
  Bottom Layer w0.3: R47.2@62.1,59.2 62.1,59.15 62.2,59.05 62.669,59.05 63.019,58.7 v1(63.1,58.7)
NetDD9_16: DD9.16 R56.2 | length 2
  Top Layer w0.2: DD9.16@55.8,59.898 v1(55.8,61.1)
  Bottom Layer w0.2: R56.2@55,61.1 v1(55.8,61.1)
NetDD9_21: DD9.21 R45.2 | length 2.4
  Top Layer w0.2: v1(53.4,56.3) v1(53.4,56.3) DD9.21@54.6,56.298 DD9.21@54.6,56.298
  Bottom Layer w0.2: v1(53.4,56.3) R45.2@54.6,56.3
NetDD9_32: DD9.32 С45.2 | length 3.1
  Top Layer w0.2: DD9.32@60.6,52.698 60.6,51.6 60.991,51.209 61.71,51.209 61.827,51.092 С45.2@61.827,50.528
NetDD10_9: DD10.9 R64.1 | length 2.6
  Top Layer w0.2: R64.1@42.575,124.2 42.575,123.525 43.2,122.9 DD10.9@44.275,122.9
NetDD10_10: DD10.10 R65.2 | length 4
  Top Layer w0.2: R65.2@41.3,124.2 41.3,123.7 42.6,122.4 DD10.10@44.275,122.4
NetDD10_11: DD10.11 С50.2 | length 1.7
  Top Layer w0.2: С50.2@42.625,121.659 42.675,121.709 43.234,121.709 43.425,121.9 DD10.11@44.275,121.9
NetDD10_22: DD10.22 R66.2 | length 1.7
  Top Layer w0.2: DD10.22@48.275,122.9 49.25,122.9 R66.2@49.75,122.4
NetDD10_23: DD10.23 R67.2 | length 1.6
  Top Layer w0.2: DD10.23@48.275,123.4 49.8,123.4 R67.2@49.8,123.3
NetDD10_24: DD10.24 R68.2 | length 1.8
  Top Layer w0.2: DD10.24@48.275,123.9 48.325,123.95 48.6,123.95 49.3,124.65 R68.2@49.75,124.65
NetHL1_3: HL1.3 HL5.1 | length 14.2
  Bottom Layer w0.2: HL5.1@45.695,130.1 HL5.1@45.695,130.1 45.694,129.306 46.07,128.93 46.07,128.2 ccw(c47.294,128.2) 47.294,126.975 48.359,126.975 ccw(c47.995,129.175) 50.225,129.175 50.225,130.425 cw(c51.15,130.425) 51.15,131.35 53,131.35 cw(c53,130.975) 53.375,130.975 HL1.3@53.375,130.1
NetHL2_1: HL2.1 HL36.3 | length 13.6
  Bottom Layer w0.2: HL2.1@3.5,118.582 5.378,118.582 ccw(c5.378,119.497) 6.025,118.85 ccw(c5.12,119.755) 6.4,119.755 6.4,121.582 ccw(c5.437,121.582) 6.119,122.262 ccw(c5.588,121.733) 5.875,122.425 ccw(c5.059,120.454) 5.058,122.587 cw(c5.059,123.845) 4.169,122.956 3.75,123.375 cw(c4.293,123.918) 3.525,123.918 3.525,125.208 cw(c4.654,125.208) 3.856,126.006 cw(c4.325,125.536) 4.325,126.2 cw(c4.325,124.651) 5.42,125.746 HL36.3@5.545,125.622
NetHL2_3: HL2.3 HL6.1 | length 14.5
  Bottom Layer w0.2: HL6.1@3.5,112.406 4.925,112.406 ccw(c4.925,113.981) 6.5,113.981 6.5,115.374 ccw(c5.024,115.374) 5.024,116.85 3.025,116.85 cw(c3.025,117.65) 2.225,117.65 2.225,119.712 cw(c2.775,119.712) 2.318,120.018 cw(c2.775,119.712) 2.469,120.169 cw(c2.775,119.712) 2.775,120.262 HL2.3@3.5,120.262
NetHL3_1: HL3.1 HL33.3 | length 14.5
  Bottom Layer w0.2: HL3.1@3.5,62.198 5.148,62.198 ccw(c5.148,63.425) 6.375,63.425 6.375,65.394 ccw(c4.75,65.158) 4.75,66.8 3.588,66.8 cw(c3.588,68.313) 2.075,68.313 2.075,69.7 cw(c2.529,69.7) 2.529,70.154 HL33.3@3.5,70.154
NetHL3_3: HL3.3 HL7.1 | length 14.9
  Bottom Layer w0.2: HL7.1@3.5,55.922 4.447,55.922 5.625,57.1 6.425,57.1 6.725,57.4 6.725,59.35 ccw(c5.655,59.35) 5.655,60.42 3.805,60.42 cw(c3.805,62.225) 2,62.225 2,62.85 cw(c3.028,62.85) 3.028,63.878 HL3.3@3.5,63.878
NetHL4_1: HL4.1 HL34.3 | length 12.2
  Bottom Layer w0.2: HL34.3@3.5,13.77 2.996,13.77 ccw(c2.996,13.104) 2.525,13.575 ccw(c3.068,13.032) 2.3,13.032 2.3,12.189 ccw(c3.239,12.189) 2.575,11.525 ccw(c3.179,12.129) 3.179,11.275 5.568,11.275 cw(c5.568,9.568) 6.775,10.775 7.733,9.817 7.734,9.816 cw(c7.392,9.475) 7.875,9.475 cw(c6.849,9.475) 7.574,8.749 6.213,7.388 cw(c6.085,7.516) HL4.1@6.085,7.335
NetHL4_3: HL4.3 HL8.1 | length 14.2
  Bottom Layer w0.2: HL4.3@5.005,8.622 4.339,7.955 ccw(c4.794,7.5) 4.15,7.5 ccw(c5.538,7.5) 4.557,6.518 4.925,6.15 ccw(c5.951,7.176) 5.951,5.725 6.6,5.725 ccw(c6.6,6.208) 6.941,5.866 8.675,7.6 ; 8.676,7.601 cw(c9.701,6.574) 9.7,8.025 11.321,8.025 cw(c11.321,7.273) 12.071,7.317 cw(c11.871,7.306) 12.06,7.239 ; HL8.1@11.234,4.869 11.354,5.299 11.5,5.701 12.059,7.238
NetHL5_3: HL5.3 HL9.1 | length 14.4
  Bottom Layer w0.2: HL9.1@39.695,130.1 39.695,128.85 ccw(c41.445,128.85) 41.445,127.1 41.975,127.1 ccw(c41.975,129.25) 44.125,129.25 44.125,130.675 cw(c45.25,130.675) 45.25,131.8 46.237,131.8 cw(c46.237,130.662) 47.375,130.662 HL5.3@47.375,130.1
NetHL6_3: HL6.3 HL10.1 | length 13.7
  Bottom Layer w0.2: HL10.1@3.5,106.13 4.7,106.13 ccw(c4.7,107.705) 6.275,107.705 6.275,108.625 ccw(c4.25,108.625) 4.25,110.65 3.225,110.65 cw(c3.225,111.525) 2.35,111.525 2.35,113.636 cw(c2.8,113.636) 2.8,114.086 HL6.3@3.5,114.086
NetHL7_3: HL7.3 HL11.1 | length 14.6
  Bottom Layer w0.2: HL11.1@3.5,49.646 5.496,49.646 ccw(c5.496,50.6) 6.45,50.6 6.45,52.9 ccw(c5,52.9) 5,54.35 3,54.35 cw(c3,55.025) 2.325,55.025 2.325,56.925 cw(c3.002,56.925) 2.79,57.568 cw(c3.002,56.925) 3.002,57.602 HL7.3@3.5,57.602
NetHL8_3: HL8.3 HL12.1 | length 14.7
  Bottom Layer w0.2: HL8.3@9.655,5.444 ccw(c10.211,4.888) 9.425,4.888 9.425,4.175 ccw(c9.908,4.175) 9.566,3.834 9.725,3.675 ccw(c11.053,5.003) 11.053,3.125 11.475,3.125 ccw(c11.475,3.789) 11.944,3.319 14.905,6.28 cw(c16.573,4.612) 16.515,6.97 cw(c16.573,4.612) 16.518,6.97 16.545,6.97 17.551,6.718 cw(c17.445,6.294) 17.879,6.234 17.593,4.089 HL12.1@17.534,3.648
NetHL9_3: HL9.3 HL13.1 | length 14.3
  Bottom Layer w0.2: HL13.1@33.695,130.1 33.695,128.555 ccw(c35.425,128.555) 35.425,126.825 36.05,126.825 ccw(c36.05,129.55) 38.775,129.55 38.775,130.775 cw(c39.35,130.775) 39.35,131.35 40.775,131.35 cw(c40.775,130.75) 41.088,131.262 cw(c40.775,130.75) 41.287,131.063 cw(c40.775,130.75) 41.375,130.75 HL9.3@41.375,130.1
NetHL10_3: HL10.3 HL14.1 | length 14
  Bottom Layer w0.2: HL14.1@3.5,99.854 4.679,99.854 ccw(c4.679,101.5) 6.325,101.5 6.325,102.65 ccw(c4.625,102.65) 4.625,104.35 3.15,104.35 cw(c3.15,105.275) 2.225,105.275 2.225,107.1 cw(c2.935,107.1) 2.935,107.81 HL10.3@3.5,107.81
NetHL11_3: HL11.3 HL15.1 | length 14.9
  Bottom Layer w0.2: HL15.1@3.5,43.37 5.37,43.37 ccw(c5.37,44.525) 6.525,44.525 6.525,47.581 ccw(c5.156,47.581) 5.156,48.95 2.875,48.95 cw(c2.875,49.525) 2.3,49.525 2.3,50.901 cw(c2.725,50.901) 2.725,51.326 HL11.3@3.5,51.326
NetHL12_3: HL12.3 HL16.1 | length 15.1
  Bottom Layer w0.2: HL12.3@15.866,3.852 15.866,2.834 ccw(c16.125,2.834) 16.125,2.575 18.175,2.575 ccw(c18.175,3.575) 19.175,3.575 19.175,5.025 cw(c20.925,5.025) 20.925,6.775 22.55,6.775 cw(c22.55,5.11) 24.215,5.11 HL16.1@24.215,3.5
NetHL13_3: HL13.3 HL17.1 | length 12.8
  Bottom Layer w0.2: HL17.1@27.695,130.1 27.695,128.889 29.259,127.325 30.275,127.325 ccw(c30.275,129.4) 32.35,129.4 32.35,130.025 cw(c33.398,130.025) 33.179,131.05 35.225,131.05 cw(c35.131,130.825) 35.375,130.825 HL13.3@35.375,130.1
NetHL14_3: HL14.3 HL18.1 | length 14
  Bottom Layer w0.2: HL14.3@3.2,101.534 2.959,101.534 ccw(c2.959,100.65) 2.075,100.65 2.075,99.65 ccw(c2.725,99.65) 2.725,99 5.559,99 cw(c5.559,98.8) 5.606,98.995 cw(c5.454,98.366) 6.1,98.366 6.1,98.364 6.1,94.85 4.828,93.578 HL18.1@3.5,93.578
NetHL15_3: HL15.3 HL19.1 | length 13.5
  Bottom Layer w0.2: HL19.1@3.5,37.094 5.125,37.094 ccw(c5.125,37.927) 5.958,37.927 5.958,39.892 5.331,40.519 cw(c5.896,41.08) 5.1,41.08 5.1,41.878 ccw(c4.503,41.878) 4.925,42.3 ccw(c4.201,41.576) 4.201,42.6 2.944,42.6 cw(c2.944,43.269) 2.275,43.269 2.275,44.45 cw(c2.875,44.45) 2.875,45.05 HL15.3@3.5,45.05
NetHL16_3: HL16.3 HL20.1 | length 14.8
  Bottom Layer w0.2: HL16.3@22.535,3.5 22.535,2.465 ccw(c23.05,2.465) 23.05,1.95 25.05,1.95 ccw(c25.05,2.775) 25.875,2.775 25.875,5.075 cw(c27.175,5.075) 27.175,6.375 28.85,6.375 cw(c28.85,5) 30.225,5 30.225,3.5 HL20.1@30.215,3.5
NetHL17_3: HL17.3 HL21.1 | length 12.4
  Bottom Layer w0.2: HL21.1@21.695,130.1 21.695,128.513 21.882,128.149 ccw(c22.75,128.825) 22.141,127.909 ccw(c22.75,128.825) 22.75,127.725 23.975,127.725 ccw(c23.975,130.125) 26.375,130.125 26.375,130.4 cw(c27.1,130.4) 27.1,131.125 28.575,131.125 cw(c28.575,130.325) 29.375,130.325 HL17.3@29.375,130.1
NetHL18_3: HL18.3 HL22.1 | length 14
  Bottom Layer w0.2: HL22.1@3.5,87.302 4.825,87.302 ccw(c4.825,88.802) 6.325,88.802 6.325,90.895 ccw(c4.445,90.895) 4.445,92.775 3.131,92.775 cw(c3.131,93.756) 2.15,93.756 2.15,94.3 cw(c3.108,94.3) 3.108,95.258 HL18.3@3.5,95.258
NetHL19_3: HL19.3 HL23.1 | length 12.5
  Bottom Layer w0.2: HL23.1@3.5,30.818 4.3,30.818 ccw(c4.3,31.668) 4.742,30.942 ccw(c4.3,31.668) 5.026,31.226 ccw(c4.3,31.668) 5.15,31.668 5.15,35.475 ccw(c4.2,35.475) 4.2,36.425 2.725,36.425 cw(c2.725,36.825) 2.325,36.825 2.325,38.375 cw(c2.724,38.375) 2.724,38.774 HL19.3@3.5,38.774
NetHL20_3: HL20.3 HL24.1 | length 15.4
  Bottom Layer w0.2: HL20.3@28.535,3.5 28.535,2.415 ccw(c29,2.415) 29,1.95 31.425,1.95 ccw(c31.425,2.275) 31.75,2.275 31.75,5.075 cw(c33.075,5.075) 33.075,6.4 35.275,6.4 cw(c35.275,5.35) 36.325,5.35 36.325,3.61 cw(c36.215,3.61) HL24.1@36.215,3.5
NetHL21_3: HL21.3 HL28.1 | length 14.3
  Bottom Layer w0.2: HL28.1@15.032,129.645 15.074,129.603 15.074,128.342 15.074,128.341 ccw(c16.614,128.341) 16.207,126.856 ccw(c16.258,127.05) 16.256,126.85 16.258,126.85 19.225,126.85 ccw(c19.225,128.325) 20.7,128.325 20.7,129.975 cw(c21.775,129.975) 21.775,131.05 22.841,131.05 cw(c22.841,130.516) 23.375,130.516 HL21.3@23.375,130.1
NetHL22_3: HL22.3 HL25.1 | length 13.8
  Bottom Layer w0.2: HL25.1@3.5,81.026 4.801,81.026 5.924,82.149 6.034,82.309 6.037,82.312 cw(c9.018,80.25) 6.159,82.479 ccw(c6.001,82.601) 6.173,82.499 ccw(c5.195,83.065) 6.325,83.065 6.325,83.55 ccw(c4.351,83.55) 4.351,85.524 3.25,85.524 cw(c3.25,86.549) 2.225,86.549 2.225,88.575 cw(c2.65,88.575) 2.65,89 3.482,89 cw(c3.482,88.982) HL22.3@3.5,88.982
NetHL23_3: HL23.3 HL26.1 | length 14.4
  Bottom Layer w0.2: HL26.1@3.5,24.542 5.342,24.542 ccw(c5.342,25.6) 6.4,25.6 6.4,26.975 ccw(c4.925,26.975) 4.925,28.45 3.35,28.45 cw(c3.35,29.5) 2.3,29.5 2.3,32.048 cw(c2.75,32.048) 2.75,32.498 HL23.3@3.5,32.498
NetHL24_3: HL24.3 HL27.1 | length 14.5
  Bottom Layer w0.2: HL24.3@34.535,3.5 34.535,2.69 ccw(c35.125,2.69) 35.125,2.1 37.175,2.1 ccw(c37.175,2.8) 37.875,2.8 37.875,5.05 cw(c39.15,5.05) 39.15,6.325 40.9,6.325 cw(c40.9,4.975) 42.25,4.975 42.25,3.535 cw(c42.215,3.535) HL27.1@42.215,3.5
NetHL25_3: HL25.3 HL29.1 | length 14
  Bottom Layer w0.2: HL29.1@3.5,74.75 4.7,74.75 ccw(c4.7,76.325) 6.275,76.325 6.275,77.05 ccw(c4.3,77.05) 4.3,79.025 3.612,79.025 cw(c3.612,80.663) 1.975,80.663 1.975,81.875 cw(c2.806,81.875) 2.806,82.706 HL25.3@3.5,82.706
NetHL26_3: HL26.3 HL30.1 | length 14.7
  Bottom Layer w0.2: HL30.1@3.5,18.266 5.125,18.266 ccw(c5.125,19.641) 6.5,19.641 6.5,21.075 ccw(c5.075,21.075) 5.075,22.5 3.2,22.5 cw(c3.2,23.425) 2.275,23.425 2.275,25.975 cw(c2.522,25.975) 2.522,26.222 HL26.3@3.5,26.222
NetHL27_3: HL27.3 HL31.1 | length 14.9
  Bottom Layer w0.2: HL27.3@40.535,3.5 40.535,2.665 ccw(c41.175,2.665) 41.175,2.025 43.325,2.025 ccw(c43.325,2.675) 43.975,2.675 43.975,4.975 cw(c45.55,4.975) 45.55,6.55 46.75,6.55 cw(c46.75,5.1) 48.2,5.1 48.2,3.5 HL31.1@48.215,3.5
NetHL28_3: HL28.3 HL32.1 | length 13.8
  Bottom Layer w0.2: HL32.1@8.866,127.869 8.913,127.448 ccw(c10.78,127.869) 10.24,126.033 ccw(c10.294,126.225) 10.293,126.025 ; 10.294,126.025 12.325,126.025 ccw(c12.325,127.625) 13.925,127.625 13.925,130.375 cw(c14.6,130.375) 14.6,131.05 15.825,131.05 cw(c15.825,130.175) 16.7,130.175 HL28.3@16.7,129.85
NetHL29_3: HL29.3 HL33.1 | length 15.1
  Bottom Layer w0.2: HL33.1@3.5,68.474 5.174,68.474 ccw(c5.174,69.775) 6.475,69.775 6.475,71.45 ccw(c4.775,71.45) 4.775,73.15 2.65,73.15 cw(c2.65,73.8) 2,73.8 2,75.775 cw(c2.655,75.775) 2.655,76.43 HL29.3@3.5,76.43
NetHL30_3: HL30.3 HL34.1 | length 14.8
  Bottom Layer w0.2: HL34.1@3.5,12.09 5.315,12.09 ccw(c5.315,13.25) 6.475,13.25 6.475,15.2 ccw(c5.25,15.2) 5.25,16.425 2.875,16.425 cw(c2.875,17) 2.3,17 2.3,19.6 cw(c2.646,19.6) 2.646,19.946 HL30.3@3.5,19.946
NetHL31_3: HL31.3 HL35.1 | length 14.6
  Bottom Layer w0.2: HL31.3@46.535,3.5 46.535,2.69 ccw(c47.075,2.69) 47.075,2.15 49.175,2.15 ccw(c49.175,2.9) 49.925,2.9 49.925,4.8 cw(c51.625,4.8) 51.625,6.5 53.05,6.5 cw(c53.05,5.335) 54.215,5.335 HL35.1@54.215,3.5
NetHL32_3: HL32.3 HL36.1 | length 14.2
  Bottom Layer w0.2: HL36.1@4.465,124.335 4.806,124.049 5.416,123.537 5.442,123.525 6,123.275 6.025,123.265 8.365,123.265 ccw(c8.365,124) 9.1,124 9.1,125.846 ccw(c8.246,125.846) 8.85,126.45 7.827,127.473 cw(c8.254,127.9) 7.65,127.9 7.65,128.532 cw(c8.418,128.532) 7.875,129.075 cw(c8.483,128.467) 8.483,129.327 9.809,129.327 cw(c9.513,128.444) HL32.3@10.445,128.444
NetR6_2: R6.2 VT1.3 | length 1.5
  Top Layer w0.2: VT1.3@16.984,123.55 R6.2@18.475,123.55
NetR9_2: R9.2 X1.20 | length 2.9
  Top Layer w0.184: R9.2@36.075,18.8 36.075,18.75 36.233,18.592 36.433,18.592 37.105,17.92 37.739,17.92 37.869,18.05 X1.20@38.575,18.05
NetR10_2: R10.2 X1.5 | length 3.6
  Top Layer w0.184: X1.5@40.085,19.55 40.088,19.553 40.835,19.553 40.961,19.68 42.82,19.68 43.1,19.4 R10.2@43.1,19
NetR12_5: R12.5 X5.4 | length 1.7
  Top Layer w0.2: X5.4@16.8,118.74 16.835,118.775 R12.5@18.498,118.775
NetR12_7: R12.7 X5.2 | length 5.3
  Top Layer w0.2: X5.2@16.8,113.66 18.548,115.408 R12.7@18.548,118.275
NetR40_1: R40.1 X9.11 | length 2.8
  Bottom Layer w0.184: R40.1@74.475,31.95 75.475,31.95 76,32.475 X9.11@76,33.5
NetR41_1: R41.1 X11.4 | length 4.2
  Top Layer w0.2: R41.1@86.552,40.55 87.25,40.55 88.425,39.375 X11.4@90.25,39.375
NetR41_3: R41.3 X11.5 | length 3.9
  Top Layer w0.184: R41.3@86.552,41.05 87.65,41.05 88.1,40.6 90.225,40.6 X11.5@90.25,40.625
NetR41_5: R41.5 X11.6 | length 4.1
  Top Layer w0.184: R41.5@86.552,41.55 87.3,41.55 88,42.25 88.375,42.25 88.75,41.875 X11.6@90.25,41.875
NetR41_7: R41.7 X11.7 | length 4.1
  Top Layer w0.184: R41.7@86.552,42.05 87.117,42.05 87.842,42.775 88.35,42.775 88.7,43.125 X11.7@90.25,43.125
NetR67_1: R67.1 R70.1 X14.2 | length 17.1
  Top Layer w0.2: v1(48,117.5) 50.8,117.5 52.125,118.825 52.125,123.525 ; R67.1@50.75,123.525 52.125,123.525 ; R70.1@50.75,126.9 52,126.9 52.6,126.3 52.6,124.5 52.125,124.025 52.125,123.525
  Bottom Layer w0.3: X14.2@48,116.2 v1(48,117.5)
NetR68_1: R68.1 R69.1 X15.2 | length 9.6
  Top Layer w0.3: R68.1@50.75,124.65 R68.1@50.75,124.7 ; R69.1@50.75,125.775 R68.1@50.75,124.7 ; v1(51.6,124.7) 51.575,124.675 50.775,124.675 R68.1@50.75,124.7
  Bottom Layer w0.3: X15.2@48,119.4 48,122.5 50.2,124.7 v1(51.6,124.7)
NetR71_2: R71.2 X16.1 | length 2.2
  Top Layer w0.2: R71.2@53.3,125.06 X16.1@55.525,125.06
NetR72_2: R72.2 X16.2 | length 1.8
  Top Layer w0.2: R72.2@53.7,122.52 X16.2@55.525,122.52
NetR75_1: R75.1 SW12.1 SW13.1 SW14.1 | length 38.5
  Top Layer w0.2: SW14.1@18.075,130.525 18.075,131.725 19.4,133.05 33.988,133.05 34.803,132.235 SW12.1@42.075,132.235 SW13.1@47.175,132.235 SW13.1@52.975,132.235
  Top Layer w0.25: SW13.1@52.975,132.235 52.985,132.225 R75.1@54.45,132.225
NetR76_1: R76.1 SW15.1 | length 1.6
  Top Layer w0.2: SW15.1@12.9,108.275 R76.1@14.479,108.275
NetR77_1: R77.1 SW10.3 | length 6.9
  Top Layer w0.2: SW10.3@6.27,93.395 6.27,90.23 6.65,89.85 R77.1@9.85,89.85
NetR78_1: R78.1 SW11.3 | length 1.8
  Top Layer w0.2: SW11.3@6.27,41.195 6.285,41.18 6.285,39.415 R78.1@6.3,39.4
NetSW4_1: SW4.1 X6.1 | length 5
  Top Layer w0.6: SW4.1@11.6,96.94 11.62,96.96 12.709,96.96 13.799,98.05 16.025,98.05 X6.1@16.025,98.125
NetSW5_1: SW5.1 X7.2 | length 4.7
  Top Layer w0.5: SW5.1@22.425,85.65 23.6,85.65 24.325,86.375 X7.2@24.325,88.825
NetSW9_1: SW9.1 X13.3 | length 74.4
  Top Layer w0.2: v1(50.1,20.425) SW9.1@52,20.425
  Bottom Layer w0.2: v1@50.1,20.43 51.175,21.505 51.175,28.2 52.3,29.325 85.725,29.325 89.65,33.25 89.65,45.5 88.425,46.725 83.01,46.725 X13.3@79.96,49.775
NetSW9_2: SW9.2 X13.4 | length 75.9
  Top Layer w0.2: SW9.2@52,14.4 v1(52,16.375)
  Bottom Layer w0.2: v1@51.95,16.375 51.95,28.325 52.5,28.875 85.9,28.875 90.075,33.05 90.075,45.725 88.625,47.175 85.1,47.175 X13.4@82.5,49.775
NetVD1_1: VD1.1 X5.1 | length 2.5
  Top Layer w0.2: X5.1@16.8,111.1 VD1.1@19.3,111.1
POWER_KEY_5: R35.2 SW6.1 | length 86.1
  Top Layer w0.2: SW6.1@7.375,111.925 v1(10.275,111.925) SW6.1@13.175,111.925 ; v1(9.75,38.45) R35.2@9.75,40.525
  Layer 2 w0.2: v1(9.75,38.45) 9.75,38.492 9.475,38.767 9.475,72.15 4.275,77.35 4.275,101.975 10.275,107.975 v1(10.275,111.925)
PWM_M1_A_4: DD3.16 R14.6 | length 1.3
  Top Layer w0.2: R14.6@27.05,118.652 27.05,118.829 27.45,119.229 DD3.16@27.45,119.8
PWM_M1_B_4: DD3.17 R14.8 | length 1.3
  Top Layer w0.2: R14.8@27.55,118.652 27.55,118.677 27.575,118.702 27.577,118.702 27.95,119.075 DD3.17@27.95,119.8
PWM_M2_A_4: DD3.18 R21.2 | length 1.2
  Top Layer w0.2: R21.2@28.45,118.65 28.45,119.675 DD3.18@28.45,119.8
PWM_M2_B_4: DD3.19 R21.4 | length 1.2
  Top Layer w0.2: R21.4@28.95,118.65 DD3.19@28.95,119.8
PWR_LED_5: R39.2 VD8.1 | length 1.3
  Top Layer w0.2: R39.2@5.3,109.7 VD8.1@5.3,111.025
REFL: R13.7 X10.14 | length 73
  Top Layer w0.2: R13.7@24.425,118.798 24.853,118.798 25.255,119.2 v1(25.325,119.2)
  Layer 2 w0.2: v1(25.325,119.2) 23.4,119.2 22.075,117.875 22.075,115.7 26.825,110.95 26.825,91.525 45.05,73.3 45.05,62.801 X10.14@47.553,60.298
REFL_4: DD3.13 R13.8 | length 1.5
  Top Layer w0.2: R13.8@24.425,119.8 DD3.13@25.95,119.8
RPI_EMMC_BOOT_5: R36.2 SW7.1 | length 24.6
  Top Layer w0.2: R36.2@4.442,42.775 4.442,41.392 3.95,40.9 3.95,24.55 6.925,21.575 SW7.1@8.855,21.575
RPI_I2C1_IMU.SCL: DD1.58 X14.3 | length 85.3
  Top Layer w0.2: DD1.58@10.03,52.243 10.857,52.243 11.825,51.275 v1(12.675,51.275)
  Bottom Layer w0.2: v1(12.675,51.275) 14.2,52.8 15.2,52.8 28.4,66 28.4,74.9 44.5,91 44.5,102.6 50.717,108.817 50.717,115.783 50.3,116.2 X14.3@49.5,116.2